# Altium PCB myCar.PcbDoc
Units mil, origin at the board's own origin, x right, y up, seen from the top; angles counter-clockwise.
Board outline 4925.26 x 1960.18 mil, 2 copper layers (Top Layer, Bottom Layer); 95 components, 90 nets, 405 pads, 30 vias.
Unrouted connection lines stored in the file: 113.
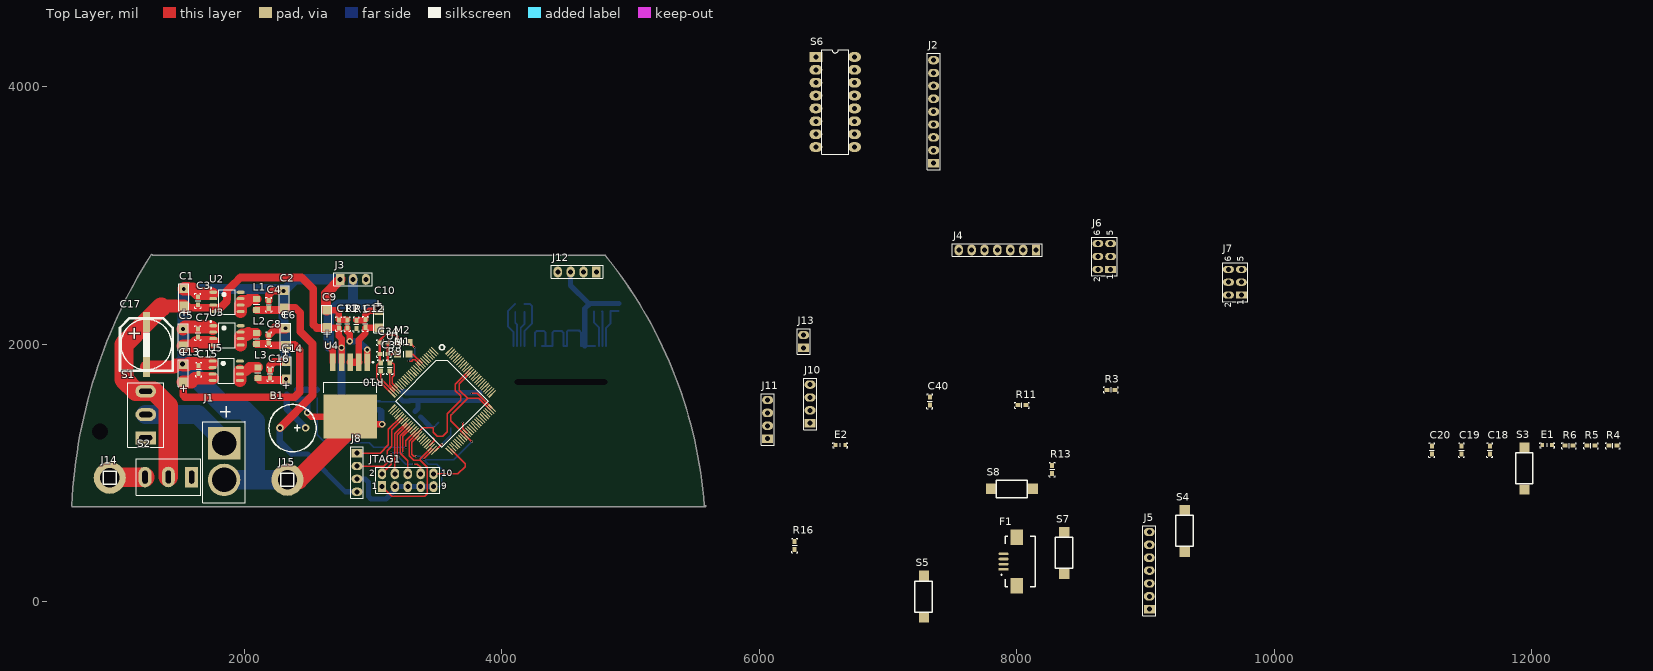
[diagram p0: Top Layer view]
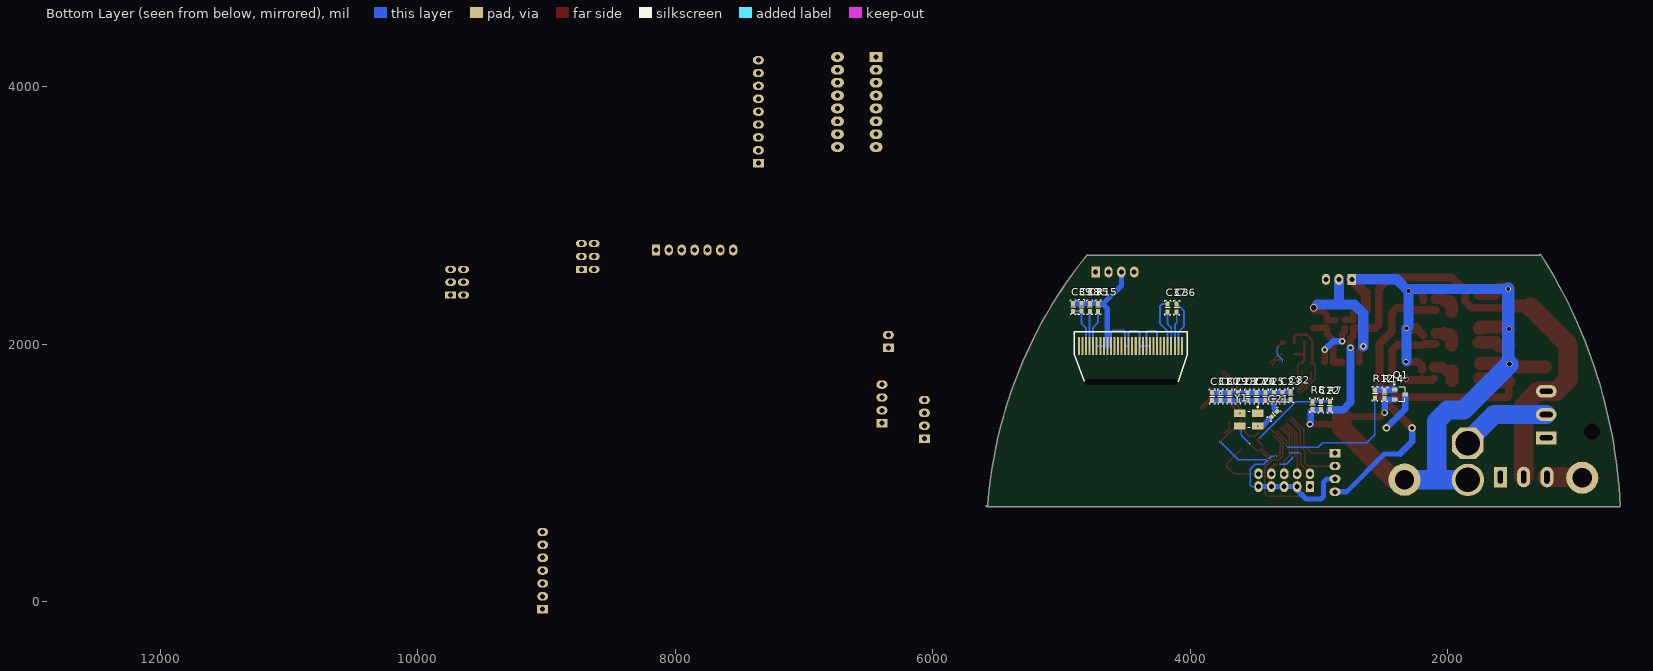
[diagram p1: Bottom Layer view, seen from below]

## Layer stack, top to bottom
Top Solder: solder mask 0.4, Solder Resist, Dk 3.5
Top Layer: signal copper 1.4
Dielectric 1: dielectric 12.6, FR-4, Dk 4.8
Bottom Layer: signal copper 1.4
Bottom Solder: solder mask 0.4, Solder Resist, Dk 3.5

## Board outline
661.99,740.94 ccw(c666.96,740.28) 666.96,735.27 5580.28,735.27 ccw(c5580.28,740.28) 5585.3,740.28 ccw(c5580.28,740.28) 5580.28,745.3 5574.65,745.3 ccw(c2055,475) 4804.62,2688.72 ccw(c4800.72,2685.58) 4800.72,2690.59 1285.01,2690.59 ccw(c1280,2690.43) 1275.77,2693.12 ccw(c4635,560) 660.03,745.15 ccw(c665.04,744.92)

## Design rules (kind name [scope] priority, off if disabled: settings)
Clearance [All] p1: gap=8
PolygonConnect [All] p1: connectstyle=Relief reliefconductorwidth=10 reliefentries=4 polygonreliefangle="90 Angle" airgapwidth=10
RoutingVias [All] p1: holewidth=28 width=50 viastyle="Through Hole" minholewidth=28 minwidth=50 maxholewidth=28 maxwidth=50
SolderMaskExpansion [All] p1: expansion=4
Width [All] p1: maxlimit=2000 minlimit=5 preferedwidth=15
29 further rules are at their usual default settings.

## Components (designator, comment, footprint, x,y, rotation, side; value= is the part's Value field where it differs from the comment)
B1 "BEEP" BEEP0905 2295,1342.01 r0 top
C1 "10uF/16V" CAP_3216（1206） 1530,2362.01 r90 top
C2 "10uF/16V" CAP_3216（1206） 2310,2347.01 r90 top
C3 "104" 0603RC 1640,2367.01 r270 top
C4 "104" 0603RC 2190,2337.01 r270 top
C5 "10uF/16V" CAP_3216（1206） 1525,2052.01 r90 top
C6 "10uF/16V" CAP_3216（1206） 2320,2057.01 r90 top
C7 "104" 0603RC 1640,2117.01 r270 top
C8 "104" 0603RC 2190,2007.01 r90 top
C9 "10uF/16V" CAP_3216（1206） 2640,2197.01 r90 top
C10 "10uF/16V" CAP_3216（1206） 3045,2192.01 r270 top
C11 "104" 0603RC 2735,2187.01 r270 top
C12 "104" 0603RC 2940,2127.01 r90 top
C13 "10uF/16V" CAP_3216（1206） 1525,1772.01 r90 top
C14 "10uF/16V" CAP_3216（1206） 2325,1797.01 r90 top
C15 "104" 0603RC 1645,1772.01 r90 top
C16 "104" 0603RC 2200,1737.01 r90 top
C17 "CAP-SMD-1000UF" CAP-SMD-1000UF 1215,1995 r270 top
C18 "104" 0603RC 11675,1145 r90 top
C19 "C0603" 0603RC 11455,1145 r90 top
C20 "C0603" 0603RC 11225,1145 r90 top
C21 "104" 0603RC 3370,1432.01 r135 bottom
C22 "104" 0603RC 2985,1552.01 r270 bottom
C23 "104" 0603RC 3285,1622.01 r270 bottom
C24 "104" 0603RC 3350,1622.01 r270 bottom
C25 "104" 0603RC 3415,1622.01 r270 bottom
C26 "104" 0603RC 3485,1622.01 r270 bottom
C27 "104" 0603RC 3555,1622.01 r270 bottom
C28 "104" 0603RC 3630,1622.01 r270 bottom
C29 "104" 0603RC 3695,1622.01 r270 bottom
C30 "104" 0603RC 3765,1622.01 r270 bottom
C31 "104" 0603RC 3830,1622.01 r270 bottom
C32 "104" 0603RC 3220,1632.01 r270 bottom
C33 "104" 0603RC 3115,1922.01 r180 top
C34 "104" 0603RC 3115,2012.01 r180 top
C35 "Cap" 0603RC 4780,2315 r270 bottom
C36 "Cap" 0603RC 4105,2250 r90 bottom
C37 "Cap" 0603RC 4175,2250 r90 bottom
C38 "Cap" 0603RC 4845,2255 r90 bottom
C39 "Cap" 0603RC 4910,2315 r270 bottom
C40 "104" 0603RC 7325,1525 r90 top
E1 "LED0" LED-0603 12120,1215 r0 top
E2 "LED0" LED-0603 6630,1215 r0 top
F1 "FPC-1-4" FPC-1-4 8010,305 r90 top
J1 "Header-XT60-FEMALE" HEADER-XT60-FEMALE 1840,1227.01 r270 top
J2 "Header1x9" HEADER1X9 7355,3805 r90 top
J3 "Header1x3" HEADER1X3 2845,2502.01 r0 top
J4 "Header1x7" HEADER1X7 7855,2730 r180 top
J5 "Header1x7" HEADER1X7 9030,235 r90 top
J6 "Header2x3" HEADER2X3 8670,2675 r90 top
J7 "Header2x3" HEADER2X3 9685,2475 r90 top
J8 "Header1x4" HEADER1X4 2880,1002.01 r270 top
J10 "Header1x4" HEADER1X4 6390,1535 r90 top
J11 "Header1x4" HEADER1X4 6060,1415 r90 top
J12 "Header1x4" HEADER1X4 4585,2555 r180 top
J13 "Header1x2" HEADER1X2 6345,2020 r90 top
J14 "OUT-" HEADER1X1 955,962.01 r0 top
J15 "OUT-" HEADER1X1 2335,947.01 r0 top
JTAG1 "Header 5X2" HEADER2X5 3265,942.01 r0 top
L1 "INTUCTOR" "L0805 - duplicate" 2095,2307.01 r270 top
L2 "INTUCTOR" "L0805 - duplicate" 2095,2042.01 r270 top
L3 "INTUCTOR" "L0805 - duplicate" 2105,1777.01 r270 top
M1 "120R磁珠" bead0805 3235,1922.01 r180 top
M2 "120R磁珠" bead0805 3235,2012.01 r180 top
Q1 "NPN" SOT-23 2370,1612.01 r270 bottom
R1 "RES" 0603RC 2870,2122.01 r90 top
R2 "1K" 0603RC 2800,2187.01 r270 top
R3 "RES" 0603RC 8701.71,1644.5 r0 top
R4 "2K" 0603RC 12600,1210 r0 top
R5 "1K" 0603RC 12430,1210 r0 top
R6 "RES" 0603RC 12260,1210 r0 top
R7 "10K" 0603RC 2915,1552.01 r270 bottom
R8 "2K" 0603RC 3050,1492.01 r90 bottom
R9 "RES" 0603RC 3130,1852.01 r270 top
R10 "RES" 0603RC 3060,1852.01 r270 top
R11 "1K" 0603RC 8010,1525 r0 top
R12 "1K" 0603RC 2565,1582.01 r90 bottom
R13 "RES" 0603RC 8275,995 r90 top
R14 "10K" 0603RC 2490,1577.01 r90 bottom
R15 "Res" 0603RC 4715,2315 r270 bottom
R16 "RES" 0603RC 6275,405 r90 top
S1 "SW-A" SW-B 1235,1452.01 r90 top
S2 "SW-A" SW-B 1410,967.01 r180 top
S3 "SW-PB" SWITCH 11950,1000 r90 top
S4 "SW-PB" SWITCH 9310,515 r90 top
S5 "SW-PB" SWITCH 7285,5 r90 top
S6 "SW-DIP8" DIP-16 6595,3880 r0 top
S7 "SW-PB" SWITCH 8375,345 r90 top
S8 "SW-PB" SWITCH 7995,880 r180 top
U1 "MK60DN512ZVLL10" QFP100 3480,1947.01 r315 top
U2 "TPS7350" TPS7350(7333) 1865,2327.01 r0 top
U3 "TPS7350" TPS7350(7333) 1865,2067.01 r0 top
U4 "LM2941(TO-263-5)" TO-263-5 2820,1567.01 r180 top
U5 "TPS7333" TPS7350(7333) 1860,1792.01 r0 top
Y1 "50M" 50M晶振(5032) 3545,1412.01 r0 bottom

## Footprints (in the part's own frame and the unit in brackets; to place one, negate y for a bottom-side part, rotate by r counter-clockwise, add the part's x,y. Pads: shape width x height; smd on the part's side, far side on the other; paste and mask are expansions set on the pad)
50M晶振(5032) [mm]
  rect 2.25x1.45 smd: 1(-1.75,-1.25) 2(1.75,-1.25) 3(1.75,1.25) 4(-1.75,1.25)
  silkscreen extent -1.87,-2.62 0.25,1.6
0603RC [mm]
  rect 0.965x0.8 smd: 1(0,0) 2(1.575,0)
  silkscreen extent -0.66,-0.58 2.24,0.58
bead0805 [mm]
  rect 1.4x1.4 smd: 1(-1.118,0) 2(1.118,0)
  silkscreen extent 0,-0.6 0,0.6, body extent -1,-0.6 1,0.6, height 0.88
BEEP0905 [mm]
  round 1.5 hole 0.8: 1(-0.457,0.152) 2(4.597,0.178)
  silkscreen extent -2.63,-4.53 6.69,4.78, body extent -2.74,-4.59 6.86,5.01, height 5
CAP-SMD-1000UF [mm]
  rect 4x1.4 smd: 1(-4.455,0.61) 2(4.404,0.61)
  silkscreen extent -5.23,-4.59 5.16,5.81, body extent -5.93,-4.64 5.87,5.86, height 10.3
CAP_3216（1206） [mil]
  rect 65x66.93 smd: 1(-66,0) 2(66,0)
  silkscreen extent -105,-40 105,40, body extent -67,-31 67,32, height 65
DIP-16 [mil]
  rect 100x75 hole 39: 1(-155,350)
  oval 100x75 hole 39: 2(-155,250) 3(-155,150) 4(-155,50) 5(-155,-50) 6(-155,-150) 7(-155,-250) 8(-155,-350) 9(145,-350) 10(145,-250) 11(145,-150) 12(145,-50) 13(145,50) 14(145,150) 15(145,250) 16(145,350)
  silkscreen extent -109,-406 99,406
FPC-1-4 [mm]
  rect 0.5x2 smd: 1(-1.365,2.825)
  oval 0.5x2 smd: 2(-0.365,2.825) 3(0.635,2.825) 4(1.635,2.825)
  rect 3x2.5 smd: 5(-4.64,0.227) 6(4.936,0.227)
  silkscreen extent -4.87,-3.43 5.13,3.36, body extent -5.82,-3.47 6.1,3.08, height 2.66
HEADER1X1 [mil]
  round 250 hole 150: 1(0,-0.99)
  silkscreen extent -50,-50 50,50, body extent -50,-49 50,49, height 336
HEADER1X2 [mil]
  rect 65x85 hole 39: 1(-50,0)
  oval 65x85 hole 39: 2(50,0)
  silkscreen extent -100,-50 100,50, body extent -95,-48 105,50, height 323
HEADER1X3 [mil]
  rect 65x85 hole 39: 1(-100,0)
  oval 65x85 hole 39: 2(0,0) 3(100,0)
  silkscreen extent -150,-50 150,50, body extent -145,-48 155,50, height 323
HEADER1X4 [mil]
  rect 65x85 hole 39: 1(-150,-5)
  oval 65x85 hole 39: 2(-50,-5) 3(50,-5) 4(150,-5)
  silkscreen extent -200,-55 200,45, body extent -200,-53 200,45, height 323
HEADER1X7 [mil]
  rect 65x85 hole 39: 1(-295,0)
  oval 65x85 hole 39: 2(-195,0) 3(-95,0) 4(5,0) 5(105,0) 6(205,0) 7(305,0)
  silkscreen extent -345,-50 355,50, body extent -345,-53 355,50, height 323
HEADER1X9 [mil]
  rect 65x85 hole 39: 1(-400,0)
  oval 65x85 hole 39: 2(-300,0) 3(-200,0) 4(-100,0) 5(0,0) 6(100,0) 7(200,0) 8(300,0) 9(400,0)
  silkscreen extent -450,-50 455,50, body extent -445,-48 455,50, height 323
HEADER2X3 [mil]
  rect 55x85 hole 39: 1(-95,-60)
  oval 55x85 hole 39: 2(-95,40) 3(5,-60) 4(5,40) 5(105,-60) 6(105,40)
  silkscreen extent -145,-110 155,90, body extent -145,-112 155,85, height 323
HEADER2X5 [mil]
  rect 65x85 hole 39: 1(-195,-50)
  oval 65x85 hole 39: 2(-195,50) 3(-95,-50) 4(-95,50) 5(5,-50) 6(5,50) 7(105,-50) 8(105,50) 9(205,-50) 10(205,50)
  silkscreen extent -245,-100 255,100, body extent -246,-97 254,99, height 323
HEADER-XT60-FEMALE [mm]
  rect 6.4x6.4 / inner rect 6.4x6.4 / far side oct 6.2x6.2 hole 4.8: 1(-0.025,0.076)
  round 6.4 hole 4.8: 2(7.163,0.076)
  silkscreen extent -7.34,-4.09 11.68,4.29, body extent -4.27,-4 11.63,4.15, height 18
"L0805 - duplicate" [mm]
  rect 1.2x1.4 smd: 1(-1.067,0) 2(1.067,0)
  silkscreen extent 0,-0.6 0,0.6
LED-0603 [mil]
  rect 29.37x29.5 smd: 1(-37.42,0) 2(37.42,0)
  silkscreen extent -57,-21 58,20, body extent -33,-15 31,14, height 27
QFP100 [mm]
  oval 2x0.254 smd: 1(0,0)
  rect 2x0.254 smd: 2(0,-0.5) 3(0,-1) 4(0,-1.5) 5(0,-2) 6(0,-2.5) 7(0,-3) 8(0,-3.5) 9(0,-4) 10(0,-4.5) 11(0,-5) 12(0,-5.5) 13(0,-6) 14(0,-6.5) 15(0,-7) 16(0,-7.5) 17(0,-8) 18(0,-8.5) 19(0,-9) 20(0,-9.5) 21(0,-10) 22(0,-10.5) 23(0,-11) 24(0,-11.5) 25(0,-12) 51(16,-12) 52(16,-11.5) 53(16,-11) 54(16,-10.5) 55(16,-10) 56(16,-9.5) 57(16,-9) 58(16,-8.5) 59(16,-8) 60(16,-7.5) 61(16,-7) 62(16,-6.5) 63(16,-6) 64(16,-5.5) 65(16,-5) 66(16,-4.5) 67(16,-4) 68(16,-3.5) 69(16,-3) 70(16,-2.5) 71(16,-2) 72(16,-1.5) 73(16,-1) 74(16,-0.5) 75(16,0)
  rect 0.254x2 smd: 26(2,-14) 27(2.5,-14) 28(3,-14) 29(3.5,-14) 30(4,-14) 31(4.5,-14) 32(5,-14) 33(5.5,-14) 34(6,-14) 35(6.5,-14) 36(7,-14) 37(7.5,-14) 38(8,-14) 39(8.5,-14) 40(9,-14) 41(9.5,-14) 42(10,-14) 43(10.5,-14) 44(11,-14) 45(11.5,-14) 46(12,-14) 47(12.5,-14) 48(13,-14) 49(13.5,-14) 50(14,-14) 76(14,2) 77(13.5,2) 78(13,2) 79(12.5,2) 80(12,2) 81(11.5,2) 82(11,2) 83(10.5,2) 84(10,2) 85(9.5,2) 86(9,2) 87(8.5,2) 88(8,2) 89(7.5,2) 90(7,2) 91(6.5,2) 92(6,2) 93(5.5,2) 94(5,2) 95(4.5,2) 96(4,2) 97(3.5,2) 98(3,2) 99(2.5,2) 100(2,2)
  silkscreen extent 0,-12.46 14.46,2, body extent 0,-13.97 16,2.03, height 1.61
SOT-23 [mil]
  rect 31.5x41.34 smd: 1(-34,-42) 2(43,-42) 3(5,40)
  silkscreen extent -82,-50 60,35, body extent -54,-50 64,50, height 43
SW-B [mil]
  rect 100x160 hole 40 slot 100 at 90 deg: 1(-181,1)
  oval 100x160 hole 40 slot 100 at 90 deg: 2(0,0) 3(181,1)
  silkscreen extent -252,-141 249,140, body extent -251,-200 250,200, height 1120
SWITCH [mil]
  rect 80x80 smd: 1(-130,5) 2(195,5)
  silkscreen extent -87,-60 154,75, body extent -125,-65 189,77, height 94
TO-263-5 [mm]
  rect 1.1x3.5 smd: 1(-3.464,-7.384) 2(-1.764,-7.384) 3(-0.063,-7.384) 4(1.636,-7.384) 5(3.336,-7.384)
  rect 10.5x8.6 smd: 6(-0.064,3.31)
  silkscreen extent -5.26,-7.51 5.14,-1.39, body extent -5.14,-7.47 5.02,6.54, height 4.56
TPS7350(7333) [mm]
  oval 1.55x0.6 smd: 1(-2.7,1.905) 2(-2.7,0.635) 3(-2.7,-0.635) 4(-2.7,-1.905) 5(2.7,-1.905) 6(2.7,-0.635) 7(2.7,0.635) 8(2.7,1.905)
  silkscreen extent -3.32,-2.45 1.6,2.87

## Part data
B1: library part BEEP0905
C1 C2 C5 C6 C9 C10 C13 C14: library part "Cap Pol1", "Polarized Capacitor (Radial)"
C3 C4 C7 C8 C11 C12 C18 C40: library part Cap, "Capacitor"
C15 C16 C21 C22 C23 C24 C25 C26 C27 C28 C29 C30 C31 C32 C33 C34: library part CAP_1, "Capacitor"
C35 C36 C37 C38 C39: library part Cap_2, "Capacitor"
E1 E2: "Typical INFRARED GaAs LED"
J1: "航模接头"
J14 J15: library part Header1x1
JTAG1: "Header, 5-Pin, Dual row"
M1 M2: library part 磁珠
Q1: library part NPN(SOT-23), "NPN Bipolar Transistor"
R2 R5 R11 R12: library part Res2, "Resistor"
R4 R8: library part Res2_2, "Resistor"
R7 R14: library part Res2_1, "Resistor"
R15: library part Res_1, "贴片电阻"
S3: library part SW-PB_SMT
S4 S5 S7 S8: "Switch"
U5: library part TPS7350
Y1: library part XTAL_S

## Free pads (board coordinates)
  round 60 hole 125: 0(880,1320)
  rect 15.75x137.79 smd far side: 1(4065,1985) 2(4092.56,1985) 3(4120.12,1985) 4(4147.68,1985) 5(4175.24,1985) 6(4202.8,1985) 7(4230.35,1985) 8(4257.91,1985) 9(4285.47,1985) 10(4313.03,1985) 11(4340.59,1985) 12(4368.15,1985) 13(4395.71,1985) 14(4423.27,1985) 15(4450.83,1985) 16(4478.39,1985) 17(4505.94,1985) 18(4533.5,1985) 19(4561.06,1985) 20(4588.62,1985) 21(4616.18,1985) 22(4643.74,1985) 23(4671.3,1985) 24(4698.86,1985) 25(4726.42,1985) 26(4753.98,1985) 27(4781.54,1985) 28(4809.09,1985) 29(4836.65,1985) 30(4864.21,1985)
  oval 641.26x40 hole 40 slot 720 at 0 deg: 1(4460,1705)

## Via types
v1: diameter 15, hole 14, Top Layer to Bottom Layer, 11 vias
v2: diameter 40, hole 30, Top Layer to Bottom Layer, 6 vias
v3: diameter 50, hole 28, Top Layer to Bottom Layer, 5 vias
v4: diameter 12, hole 10, Top Layer to Bottom Layer, 5 vias
v5: diameter 50, hole 30, Top Layer to Bottom Layer, 1 vias
v6: diameter 60, hole 40, Top Layer to Bottom Layer, 1 vias
v7: diameter 50, hole 40, Top Layer to Bottom Layer, 1 vias

## Nets (pads, with @x,y where several pads share a name; then routed paths per layer and width w, separated by ;. In a path a pad name is that pad's centre, name@x,y a point inside that pad or via, vN(x,y) a via of type N, cw(c..) or ccw(c..) an arc to the next point about the centre after c; other vN are vias at no path point)
5V: B1.1 C2.1 C4.2 J6.2 J7.2 J8.4 J10.4 J11.4 L1.2 | length 2267.6
  Top Layer w60: L1.2 2294,2265.01 C2.1 2396,2281.01 2435,2242.01 2435,2097.01 2530,2002.01 2530,1601.01 B1.1
  Bottom Layer w40: 2370,1147.01 2490,1147.01 2785,852.01 J8.4
  Bottom Layer w50: B1.1 2277,1240.01 2370,1147.01
5V_TO_3.3V: C6.1 C8.1 C13.1 C15.1 J4.7 J5.7 L2.2 U5.3 U5.4 | length 1906.1
  Top Layer w60: 1525,1602.01 C13.1 ; 1540,1587.01 2390,1587.01 2430,1627.01 2430,1952.01 2390,1992.01 2321,1992.01 C6.1 2206,1991.01 ; L2.2 C8.1@2183,2000.01
  Top Layer w100: C13.1 1589,1706.01 1617,1734.01 1755,1734.01
6V: C10.1 C12.2 C40.2 J3.2 R1.2 U4.5 | length 1241.2
  Top Layer w50: v3(2655,1982.01) 2688.64,1948.37 U4.5 ; R1.2@2870.99,2185.01 2935.99,2185.01 C12.2 2940,2227.01 2971,2258.01 C10.1
  Bottom Layer w50: 2845,2312.01 2850,2307.01 ; 3015,2307.01 v6(3040,2282.01)
  Bottom Layer w80: v3(2655,1982.01) 2655,2237.01 2725,2307.01 2850,2307.01 3015,2307.01 ; 2845,2312.01 J3.2
7.2: C5.1 C7.2 U3.3 U3.4 | length 245.3
  Top Layer w100: C5.1 1602.01,1986.01 1630.01,2014.01 1758.7,2014.01
7.2V: C1.1 C3.2 C9.1 C11.2 C17.1 R7.2 S1.3 S2.2 U2.3 U2.4 U4.4 | length 4414.2
  Top Layer w50: C9.1@2646.01,2125 C11.2 2735,2062.01 2755.57,2041.44 U4.4
  Top Layer w60: C1.1@1543.81,2282.2 1815.19,2282.2 1863.3,2330.31 1863.3,2348.44 1865,2350.14 1865,2413.14 1923.68,2471.82 1924.81,2471.82 1970,2517.01 2445,2517.01 2535,2427.01 2535,2152.01 2562.01,2125 C9.1@2646.01,2125
  Top Layer w100: 1354,2285.4 1354,2296.01 C1.1 C1.1@1543.81,2282.2
  Top Layer w150: 1354,2285.4 C17.1 1065,1996.4 1065,1725 1156.99,1633.01 S1.3 1299,1633.01 1410,1522.01 S2.2
  Bottom Layer w60: v3(2755,1972.01) 2755,1547.01 2812.01,1490 R7.2
AGND: C1.2 C2.2 C3.1 C4.1 C5.2 C6.2 C7.1 C8.2 C9.2 C10.2 C11.1 C12.1 C13.2 C14.2 C15.2 C16.2 C17.2 C22.2 C40.1 J1.2 J3.1 J15.1 Q1.2 R2.1 R3.1 R8.1 R14.1 U2.1 U2.2 U3.1 U3.2 U4.2 U4.3 U4.6 U5.1 U5.2 | length 8464.1
  Top Layer w50: v5(2490,1467.01) 2520.3,1436.71 U4.6 2882.2,1377.01 v3(3070,1377.01) ; C9.2 2714,2263.01 2735,2242.01 C11.1 R2.1 ; U4.2 2889.43,2031.44 2940,2082.01 C12.1 3044,2127.01 C10.2
  Top Layer w60: C8.2 2243.99,2123.01 ; C4.1 2190,2382.01 2221,2413.01 C2.2 ; C16.2 2200,1832.01 2231,1863.01 C14.2 ; U4.3 U4.2
  Top Layer w80: 2243.99,2123.01 C6.2 ; C9.2 2635,2268.01 2635,2392.01 J3.1
  Top Layer w100: C17.2 1452.5,1821.6 1469.91,1839.01 C13.2@1525,1839.01 ; C13.2 1556,1838.01 1567,1849 1746.7,1849 ; v2(1525,2118.01) 1538.99,2132 1745.01,2132 1755,2122.01 ; 1565,2432.01 1534,2432.01 v2(1530,2428.01) 1602.19,2428.01 1640,2390.2 U2.1@1750,2390.2
  Top Layer w150: J15.1 2419.01,946.02 2822.5,1349.51 U4.6
  Bottom Layer w20: R8.1 R8.1@3065,1477.01 ; v3@3065,1382.01 v3(3070,1377.01)
  Bottom Layer w40: C22.2 R8.1@3047.99,1490
  Bottom Layer w50: Q1.2 2482,1569.01 R14.1 v5(2490,1467.01) ; v3@3065,1382.01 R8.1@3065,1477.01
  Bottom Layer w80: v2(1530,2428.01) 2289,2428.01 v2(2305,2412.01) ; v2@2320,1867.01 v2(2320,2122.01) 2305,2137.01 v2(2305,2412.01) ; J3.1 2395,2502.01 v2(2305,2412.01)
  Bottom Layer w100: v7@1530,1843.01 v2(1530,2428.01)
  Bottom Layer w150: v7@1525,1838.01 1876,1487.01 2000,1487.01 2085,1402.01 2085,997.01 ; J1.2 2033,945.01 ; J1.2@1844.01,946.02 J15.1
  other v2: 2325,1862.01
  other v7: 1520,1845
AX_1: J6.3 U1.2
AX_2: J7.3 U1.57
BEEP: R12.1 U1.39 | length 1171.3
  Top Layer w10: v1(3255,1197.01) 3255,1245.27 3253.26,1247.01 U1.39
  Bottom Layer w10: R12.1 2565,1297.01 2630,1232.01 2970,1232.01 3005,1197.01 v1(3255,1197.01)
DGND: C18.1 C19.1 C20.1 C21.2 C23.2 C24.2 C25.2 C26.2 C27.2 C28.2 C29.2 C30.2 C31.2 C32.2 C35.1 C38.2 C39.1 E1.2 J4.6 J5.6 J6.1 J7.1 J8.3 J10.3 J11.3 J12.3 J13.1 JTAG1.3 JTAG1.5 JTAG1.7 JTAG1.9 M2.1 pad.1@4065,1985 pad.8 pad.10 pad.11 pad.12 pad.13 pad.16 pad.17 pad.21 pad.22 pad.23 pad.24 pad.25 pad.29 pad.30 R3.2 R13.1 R15.1 S3.2 S6.9 S6.10 S6.11 S6.12 S6.13 S6.14 S6.15 S6.16 U1.9 U1.41 U1.49 U1.60 U1.74 U1.88 Y1.2 | length 5954.2
  Top Layer w10: v1(3275,1867.01) 3300,1867.01 3310,1877.01 3327.29,1877.01 U1.9 ; M2.1@3283.72,2012.01 v1(3323.72,1972.01) ; v1(3335,1127.01) 3315,1127.01 3300,1142.01 3300,1238.07 U1.41 ; v1(3395,1102.01) 3395,1110.36 U1.49 ; U1.88 3670,1691.59 3670,1641.69 3734.69,1577.01 ; v1(3767.42,1242.01) U1.60 3603.9,1405.53 3603.9,1446.22 3734.69,1577.01 ; U1.74 3822.16,1577.01 3734.69,1577.01
  Top Layer w40: M2.1 M2.1@3283.72,2012.01
  Bottom Layer w10: v1(3275,1867.01) 3323.72,1915.72 v1(3323.72,1972.01) ; v1(3335,1127.01) 3370,1127.01 v1(3395,1102.01) ; JTAG1.9 3520,892.01 3535,907.01 3535,1027.01 3495,1067.01 3430,1067.01 v1(3395,1102.01) ; v1(3767.42,1242.01) 3627.42,1102.01 v1(3395,1102.01)
  Bottom Layer w15: pad.8 4257.91,2087.91 4270,2100 4330,2100 4340.59,2089.41 pad.11 ; pad.10 pad.11 ; pad.25 pad.24 pad.23 pad.22 pad.21 4616.18,2088.82 4600,2105 4515,2105 4505.94,2095.94 pad.17 pad.16 4478.39,2088.39 4466.77,2100 4405,2100 4395.71,2090.71 pad.13 pad.12 pad.11
  Bottom Layer w40: J8.3 2940,952.01 2965,927.01 2965,817.01 2985,797.01 3100,797.01 3170,867.01 JTAG1.3 JTAG1.9 ; C32.2 3232.99,1557.01 3282.01,1557.01 C23.2 C24.2 ; C21.2 3350,1499.7 C24.2 ; C31.2 C30.2 C29.2 C28.2 C27.2 C26.2 C25.2 C24.2 ; J12.3 4535,2455 4675,2315 4685,2315 ; pad.22 4645,1986.26 4645,2275 4685,2315 ; C39.1 C35.1 R15.1 4685,2315
  other v4: 3613.9,1461.22
DIR1: J6.4 U1.1
DIR2: J7.4 U1.56
KEY1: S4.2 U1.90
KEY2: S5.2 U1.91
KEY3: S7.2 U1.92
KEY4: S8.2 U1.5
MCU_3.3V: C14.1 C16.1 C21.1 C23.1 C24.1 C25.1 C26.1 C27.1 C28.1 C29.1 C30.1 C31.1 C32.1 J2.9 J12.4 JTAG1.1 L3.2 M1.1 pad.6 pad.9 R4.2 R5.2 R11.2 R16.2 U1.8 U1.40 U1.48 U1.61 U1.75 U1.89 Y1.4 | length 3485.2
  Top Layer w10: JTAG1.1 3145,817.01 3400,817.01 3420,837.01 3420,1042.01 3365,1097.01 ; M1.1 3310.13,1922.01 U1.8 ; U1.48 3365,1108.2 3365,1097.01 ; v4(3695,1392.01) 3695,1342.26 U1.61 ; U1.89 3640,1689.43 3640,1637.01 3680,1597.01 3680,1562.01 3575,1457.01 3575,1317.01 3540,1282.01 3500,1282.01 3466.1,1315.91 3466.1,1347.8 3384.27,1347.8 3343.19,1306.72 U1.40 3280,1245.91 3280,1132.01 3315,1097.01 3365,1097.01 ; v4(3765,1617.01) 3810,1617.01 U1.75
  Top Layer w60: L3.2 2118.99,1721.02 2190,1721.02 C16.1@2200,1731.02 ; C16.1@2200,1721.02 2315.01,1721.02 C14.1
  Bottom Layer w10: Y1.4@3439.21,1362.8 v4(3476.1,1362.8) ; Y1.4@3466.1,1347.8 3510.32,1392.01
  Bottom Layer w40: C32.1 3245,1632.01 3255,1622.01 C23.1 C24.1 C25.1 C26.1 C27.1 C28.1 C29.1 C30.1 C31.1 ; C21.1 Y1.4@3439.21,1362.8
  other v2: 2325,1727.01
MOTOR7.2V: J14.1 S2.3 | length 261.5
  Top Layer w150: J14.1@970,972.01 976,966.01 S2.3
NetB1_2: B1.2 Q1.3 | length 318.5
  Bottom Layer w50: Q1.3 2330,1495.01 B1.2
NetC18_2: C18.2 R6.1
NetC19_2: C19.2 U1.12
NetC20_2: C20.2 U1.13
NetC35_2: C35.2 pad.27 | length 268.6
  Bottom Layer w15: C35.2 4781.54,2251.46 pad.27
NetC36_1: C36.1 pad.3 | length 271.3
  Bottom Layer w15: C36.1 4105,2165 4120,2150 4120,1985.12 pad.3
NetC36_2: C36.2 pad.2 | length 367.4
  Bottom Layer w15: pad.2 4092.56,2092.44 4050,2135 4050,2257.01 C36.2
NetC37_1: C37.1 pad.4 | length 276.3
  Bottom Layer w15: pad.4 4147.68,2127.68 4175,2155 C37.1
NetC37_2: C37.2 pad.5 | length 401.8
  Bottom Layer w15: C37.2 4217.99,2312.01 4235,2295 4235,2160 4175.24,2100.24 pad.5
NetC38_1: C38.1 C39.2 pad.28 | length 347.9
  Bottom Layer w15: pad.28 4809.09,2124.09 4845,2160 C38.1 C39.2@4907.99,2255
NetDP1_26: pad.26 R15.2 | length 284.1
  Bottom Layer w15: R15.2 4715,2167.95 4753.98,2128.98 pad.26
NetE1_1: E1.1 R5.1
NetE2_1: E2.1 R11.1
NetJ1_1: J1.1 S1.2 | length 720.8
  Bottom Layer w150: S1.2 1639,1452.01 J1.1@1863,1228.01
NetL1_1: L1.1 U2.5 U2.6 U2.7 | length 171.8
  Top Layer w80: 2018.92,2332.2 2035.73,2349.01 L1.1
  Top Layer w100: U2.5 U2.6 ; 1980.19,2332.2 2018.92,2332.2
NetL2_1: L2.1 U3.5 U3.6 U3.7 | length 200.6
  Top Layer w80: 2030.73,2084.01 L2.1
  Top Layer w100: U3.5 U3.6 1971.3,2058.31 1985.19,2072.2 2018.92,2072.2 2030.73,2084.01
NetL3_1: L3.1 U5.5 U5.6 U5.7 | length 176.7
  Top Layer w80: 2013.7,1790.71 2042,1819.01 L3.1
  Top Layer w100: U5.5 U5.6 1966.3,1790.71
NetQ1_1: Q1.1 R12.2 R14.2 | length 151
  Bottom Layer w50: Q1.1 R12.2@2563.01,1646.01
NetR1_1: R1.1 R2.2 U4.1 | length 373.1
  Top Layer w50: R2.2 2800,2097.01 2820,2077.01 v3(2820,2022.01) ; v3(2955,1957.01) 2956.36,1955.65 U4.1
  Bottom Layer w50: v3(2820,2022.01) 2890,2022.01 v3(2955,1957.01)
NetR13_2: R13.2 S4.1 S5.1 S7.1 S8.1
OSC: U1.50 Y1.3 | length 231.6
  Top Layer w10: U1.50 v1(3534.49,1222.01)
  Bottom Layer w10: v1(3534.49,1222.01) 3603.9,1291.42 Y1.3@3603.9,1347.8
OUT1: J4.5 U1.3
OUT2: J4.4 U1.4
OUT3: J4.3 U1.58
OUT4: J4.2 U1.59
OUT5: J4.1 U1.94
OUT6: J5.5 U1.80
OUT7: J5.4 U1.81
OUT8: J5.3 U1.82
OUT9: J5.2 U1.83
OUT10: J5.1 U1.55
PTB1: J10.2 U1.54
PTB16: U1.62
PTB17: J13.2 U1.63
PTB20: U1.66
PTB21: U1.67
PTB22: J11.2 U1.68
PTB23: U1.69
PTC0: E2.2 U1.70
PTC4: pad.19 U1.76
PTC5: pad.18 U1.77
PTC6: pad.15 U1.78
PTC7: pad.14 U1.79
PTC12: J12.2 U1.84
PTC13: J12.1 U1.85
PTD4: U1.97
PTD5: U1.98
PWM1: F1.1 U1.71
PWM2: F1.2 U1.72
PWM3: F1.3 U1.73
PWM4: F1.4 U1.99
RESET_B: JTAG1.10 R4.1 R6.2 S3.1 U1.52 | length 447.7
  Top Layer w10: JTAG1.10 3660,992.01 3715,1047.01 3715,1071.72 U1.52
RX: J8.2 U1.32 | length 635.9
  Top Layer w10: J8.2 3085,1052.01 3110,1077.01 3110,1172.01 3145,1207.01 3145,1333.62 U1.32
STEER: J3.3 U1.53
SW1: J2.8 S6.1 U1.6
SW2: J2.7 S6.2 U1.7
SW3: J2.6 S6.3 U1.93
SW4: J2.5 S6.4 U1.95
SW5: J2.4 S6.5 U1.96
SW6: J2.3 S6.6 U1.65
SW7: J2.2 S6.7 U1.64
SW8: J2.1 S6.8 U1.100
TCLK: JTAG1.4 U1.34 | length 434.4
  Top Layer w10: JTAG1.4 3170,1302.94 U1.34
TD0: JTAG1.6 U1.36 | length 426.4
  Top Layer w10: JTAG1.6 3270,1092.01 3210,1152.01 3210,1287.26 U1.36
TD1: JTAG1.8 U1.35 | length 552.3
  Top Layer w10: v1(3200,1122.01) 3190,1132.01 3190,1295.1 U1.35 ; v1(3315,1067.01) 3345,1067.01 3370,1042.01 JTAG1.8 JTAG1.8@3365,997.01
  Bottom Layer w10: v1(3200,1122.01) 3255,1067.01 v1(3315,1067.01)
TMS: JTAG1.2 U1.37 | length 509.1
  Top Layer w10: JTAG1.2 3070,997.01 3140,1067.01 v1(3140,1157.01) ; v1(3235,1157.01) 3232.48,1159.53 3232.48,1281.91 U1.37
  Bottom Layer w10: v1(3140,1157.01) v1(3235,1157.01)
TX: J8.1 U1.31 | length 526.5
  Top Layer w10: J8.1 3055,1152.01 3120,1217.01 3120,1336.46 U1.31
VDDA: C33.1 C34.1 M1.2 R9.1 U1.22 | length 492.1
  Top Layer w10: R9.1 3155,1852.01 3165,1842.01 3165,1757.01 3148,1740.01 3148,1696.78 3187.69,1657.08 U1.22
  Top Layer w20: C34.1 C33.1 ; R9.1 3130,1857.01 3115,1872.01 C33.1 ; M1.2 C33.1
VRH: R9.2 U1.23 | length 167.4
  Top Layer w10: R9.2 3130,1684.55 U1.23
VRL: R10.2 U1.24 | length 204.5
  Top Layer w10: R10.2 3060,1729.1 3159.85,1629.24 U1.24
VSSA: C33.2 C34.2 M2.2 R10.1 U1.25 | length 695.2
  Top Layer w10: R10.1 3045,1852.01 3030,1837.01 3030,1728.88 U1.25
  Top Layer w20: R10.1 3052.99,1859.02 C33.2 C34.2 3052.99,2030 3095,2072.01 3175,2072.01 3191,2056.01 M2.2
VT: C22.1 R7.1 R8.2 U1.47 | length 744.1
  Top Layer w10: U1.47 3438.24,1210.25 3475,1247.01 3475,1262.01 v4(3465,1272.01)
  Bottom Layer w10: R8.2@3052.01,1552.01 3180,1552.01 3460,1272.01 v4(3465,1272.01)
  Bottom Layer w20: R7.1@2917.01,1554.02 R8.2
pads on no net: F1.5 F1.6 J6.5 J6.6 J7.5 J7.6 J10.1 J11.1 R16.1 S1.1 S2.1 U1.10 U1.11 U1.14 U1.15 U1.16 U1.17 U1.18 U1.19 U1.20 U1.21 U1.26 U1.27 U1.28 U1.29 U1.30 U1.33 U1.38 U1.42 U1.43 U1.44 U1.45 U1.46 U1.51 U1.86 U1.87 U2.8 U3.8 U5.8 Y1.1

## Silkscreen, mask and mechanical layers (free items; w line width, h text height)
Bottom Overlay:
  lines w10: 4095,1705 4025.04,1915 4025.04,2094.96 4899.96,2094.96 4899.96,1920.04 4822.13,1710.04

## Text inside footprints (layer, text, board x,y; h text height)
C1: Top Overlay "+" at 1560,2207.01 h60 r90
C2: Top Overlay "+" at 2340,2192.01 h60 r90
C5: Top Overlay "+" at 1555,1897.01 h60 r90
C6: Top Overlay "+" at 2350,1902.01 h60 r90
C9: Top Overlay "+" at 2670,2042.01 h60 r90
C10: Top Overlay "+" at 3015,2347.01 h60 r270
C13: Top Overlay "+" at 1555,1617.01 h60 r90
C14: Top Overlay "+" at 2355,1642.01 h60 r90
C17: Top Overlay "+" at 1103.57,2139.68 h98.43 r270
J6: Top Overlay "6" at 8650,2840 h50 r90; Top Overlay "5" at 8750,2840 h50 r90; Top Overlay "2" at 8650,2480 h50 r90; Top Overlay "1" at 8750,2500 h50 r90
J7: Top Overlay "6" at 9665,2640 h50 r90; Top Overlay "5" at 9765,2640 h50 r90; Top Overlay "2" at 9665,2280 h50 r90; Top Overlay "1" at 9765,2300 h50 r90
JTAG1: Top Overlay "10" at 3530,972.01 h50; Top Overlay "9" at 3530,872.01 h50; Top Overlay "1" at 2990,872.01 h50; Top Overlay "2" at 2970,972.01 h50
U2: Mechanical 15 "1" at 1882.71,2320.54 h29.53 r90
U3: Mechanical 15 "1" at 1882.71,2060.54 h29.53 r90
U5: Mechanical 15 "1" at 1877.71,1785.54 h29.53 r90